# EAGLE board Printrhub (EAGLE 7.5.0)
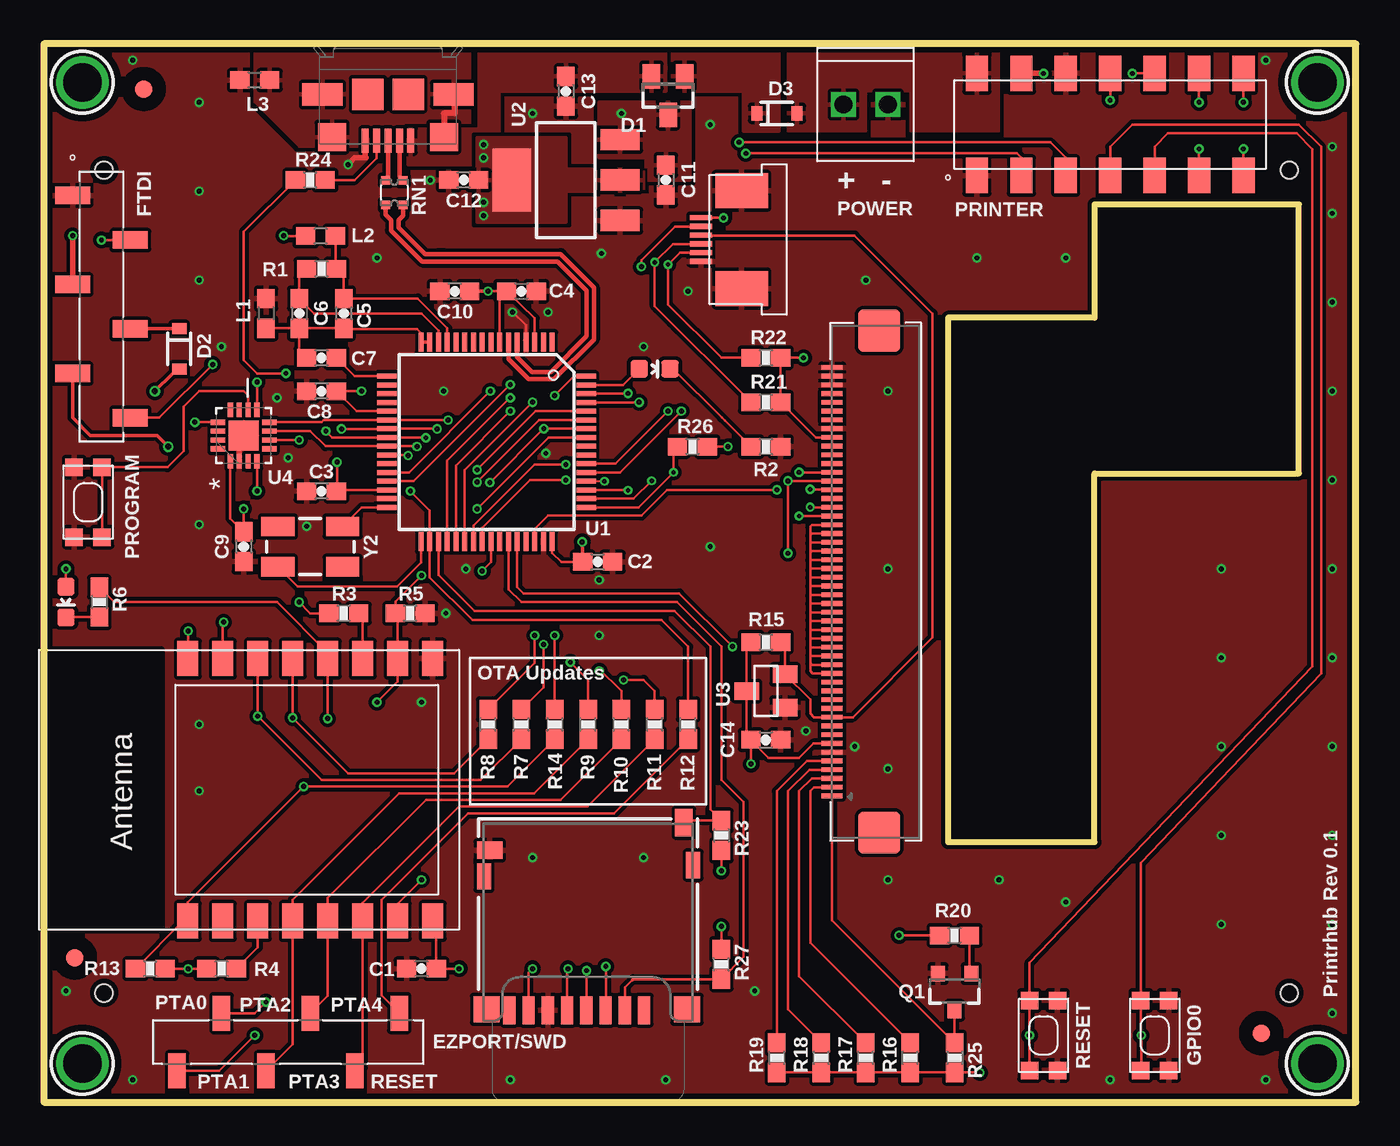
[diagram p0: board, top side]
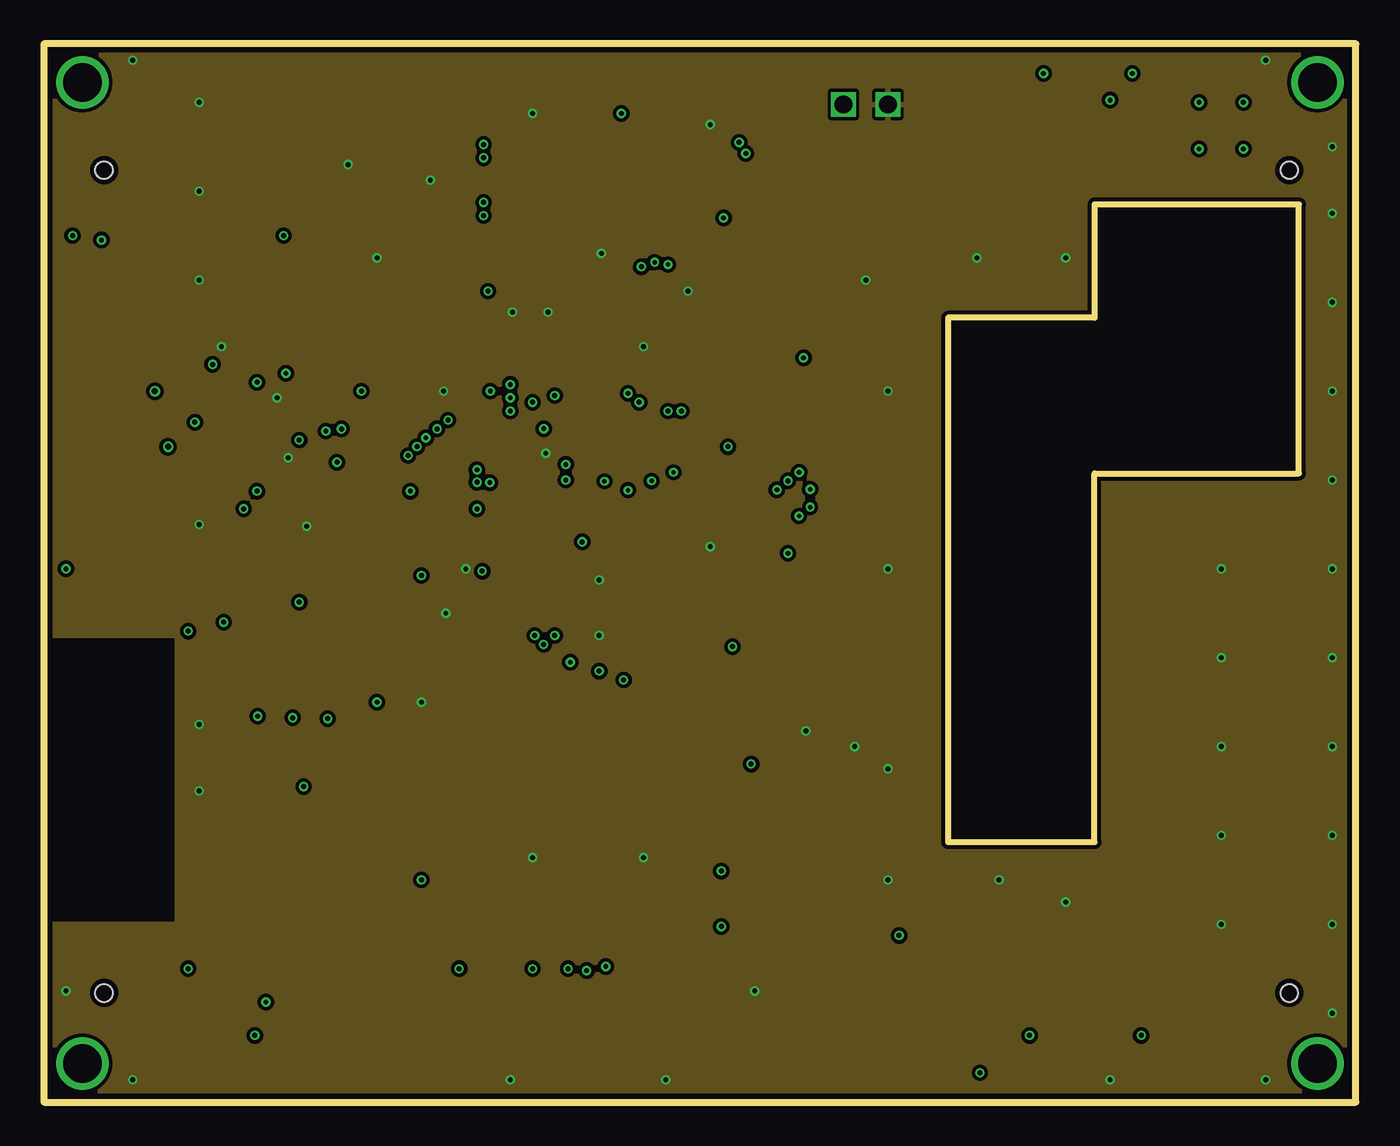
[diagram p1: board, inner layer GND]
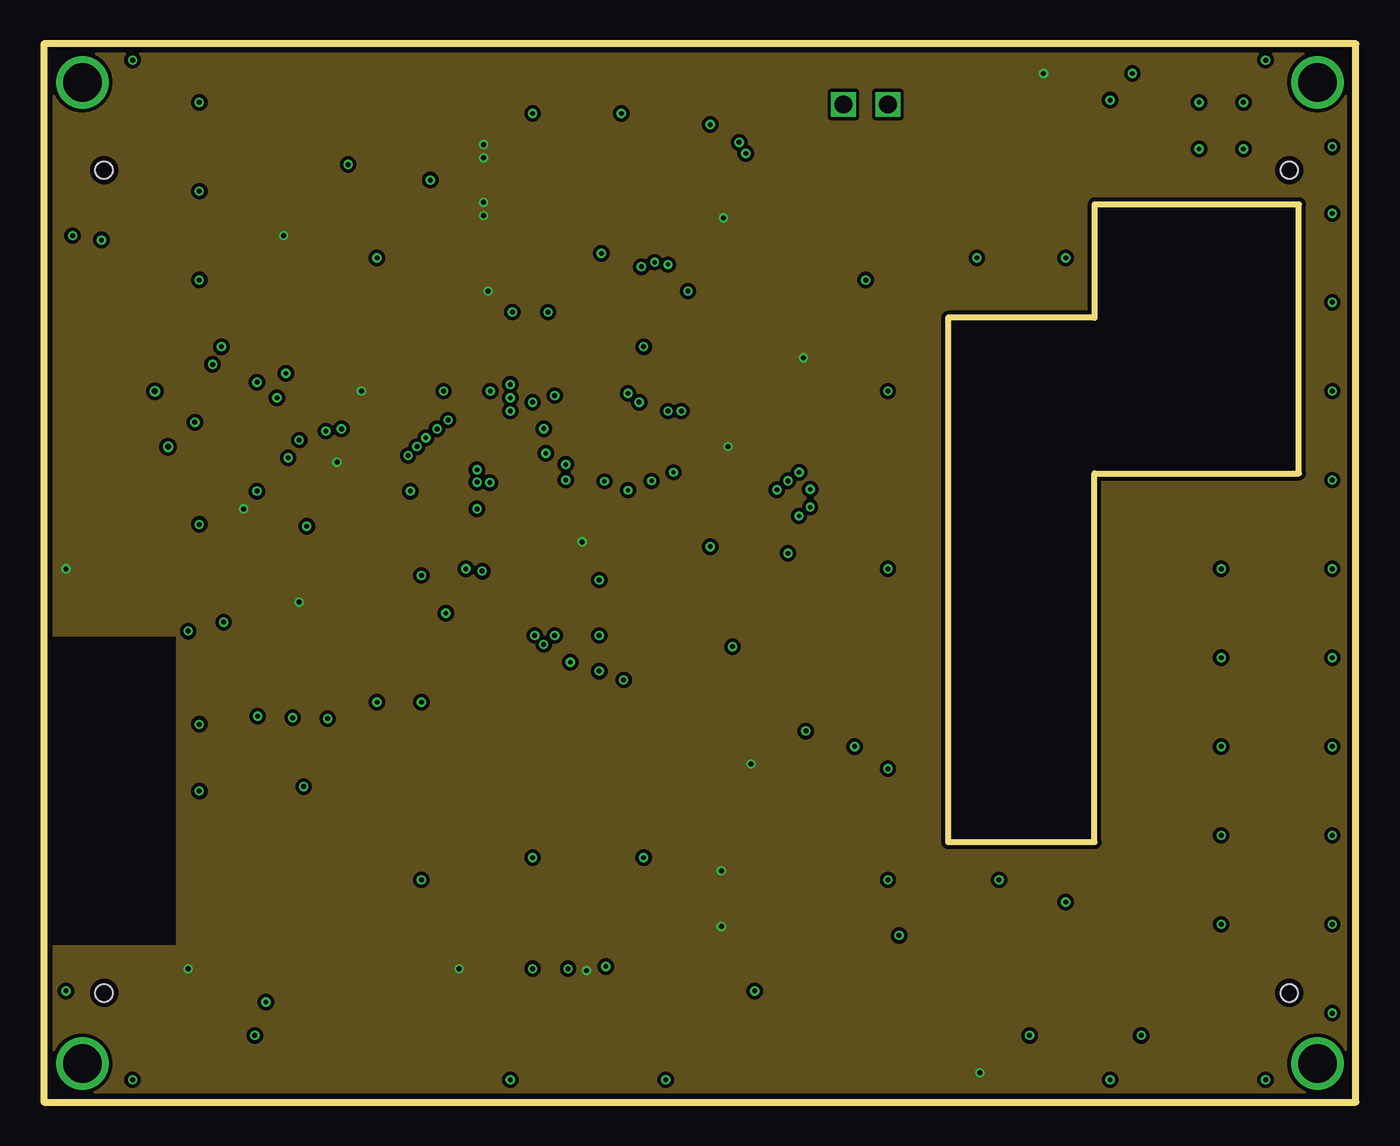
[diagram p2: board, inner layer 3V3]
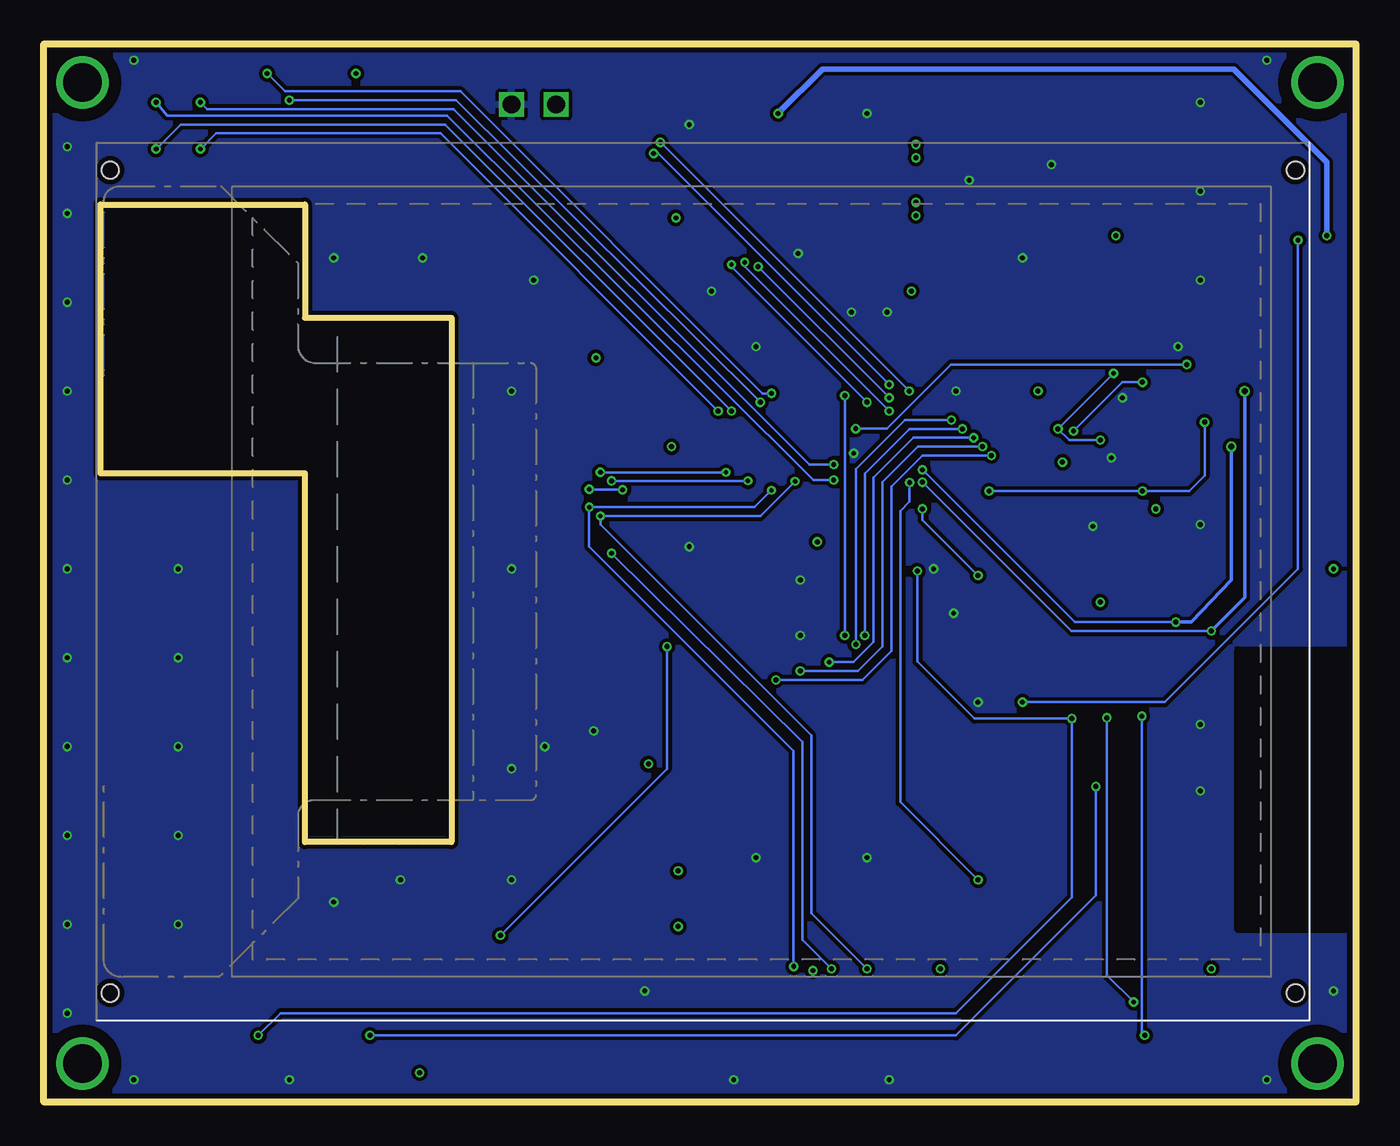
[diagram p3: board, bottom side, seen from below]

Size 75 x 60.5 mm. Coordinates in mm from the lower left corner, seen from the top.
Outline: 0,0 75,0 75,60.5 0,60.5 0,0
Outline: 51.69,14.86 60.07,14.86 60.07,35.94 71.75,35.94 71.75,51.31 60.07,51.31 60.07,44.83 51.69,44.83 51.69,14.86
Copper layers (1+2*15+16): Top 0.035mm / dielectric 0.38mm / GND 0.035mm / dielectric 0.71mm / 3V3 0.035mm / dielectric 0.38mm / Bottom 0.035mm
Design rules "PCB-POOL HighSpec_ML4 *": minimum track width 0.125mm, minimum drill 0.2mm, track to track 0.125mm, track to pad 0.125mm, pad to pad 0.125mm, via to via 0.125mm, smd to smd 0.125mm, copper to edge 0.3mm, drill to drill 0.2mm, minimum pad ring 0.2mm, minimum via ring 0.125mm, stop-mask expansion 0.075mm, vias tented up to drill 11mil, thermal gap 0.2mm
Net classes: 1 USB: width 0.267 mm, drill 0.33 mm, clearance 0.159 mm; 2 Top GND Pour: clearance 0.762 mm to class 1
Milling: area 51.7,14.9 to 71.8,51.3

## Footprints (pad centres in the part's own frame; a part is rotated, then mirrored left to right if it is on the bottom)
0603-CAP = smd 1.1 x 1: 1 -0.85,0; 2 0.85,0
SOT23 = smd 1 x 1.4: 1 -0.95,-1.1; 2 0.95,-1.1; 3 0,1.1
SOD-323 = smd 0.63 x 0.83: A 1.15,0; C -1.15,0
1X06_SMD_STRAIGHT = smd 1 x 2: 1 0,1.65; 2 -2.54,-1.65; 3 -5.08,1.65; 4 -7.62,-1.65; 5 -10.16,1.65; 6 -12.7,-1.65
DM3D-SF = smd 0.7 x 1.6: 1 3.2,0.8; 2 2.1,0.8; 3 1,0.8; 4 -0.1,0.8; 5 -1.2,0.8; 6 -2.3,0.8; 7 -3.4,0.8; 8 -4.5,0.8 | smd 1.5 x 1.5: 9 -5.8,0.85; 14 5.65,0.85 | smd 0.8 x 1.5: 10 -5.95,8.45; 13 6,9.1 | smd 1.45 x 1: 11 -5.625,9.95 | smd 1 x 1.55: 12 5.475,11.525
1981584-1 = smd 0.4 x 1.35: 1 -1.3,4.1; 2 -0.65,4.1; 3 0,4.1; 4 0.65,4.1; 5 1.3,4.1 | smd 1.8 x 1.8: M1 -1.15,1.45; M2 1.15,1.45 | smd 2.3 x 1.3: S1 -3.75,1.45; S2 3.75,1.45 | smd 1.6 x 1.6: S3 -3.2,3.885; S4 3.2,3.885
1X02_2.54_SCREWTERM = drill 1.016 square: P1 2.54,0; P2 0,0
0603 = smd 1.1 x 1: 1 -0.85,0; 2 0.85,0
LED-0603 = smd 1 x 1: A 0,-0.877; C 0,0.877
2X07_SMT = smd 1.27 x 2.032: 1 -7.62,-2.921; 2 -7.62,2.921; 3 -5.08,-2.921; 4 -5.08,2.921; 5 -2.54,-2.921; 6 -2.54,2.921; 7 0,-2.921; 8 0,2.921; 9 2.54,-2.921; 10 2.54,2.921; 11 5.08,-2.921; 12 5.08,2.921; 13 7.62,-2.921; 14 7.62,2.921
SOT23-3 = smd 0.8 x 0.9: 1 -0.95,-1; 2 0.95,-1; 3 0,1.1
0603-RES = smd 1.1 x 1: 1 -0.85,0; 2 0.85,0
EXB34V = smd 0.5 x 0.5: 1 -0.5,-0.7; 2 0.5,-0.7; 3 0.5,0.7; 4 -0.5,0.7
KMR2 = smd 1 x 1: 1 2,0.8; 2 2,-0.8; 3 -2,0.8; 4 -2,-0.8
TFT_2.83IN_240X320_50PIN = smd 0.275 x 1.2 bottom: 1 12.25,-10.39; 2 11.75,-10.39; 3 11.25,-10.39; 4 10.75,-10.39; 5 10.25,-10.39; 6 9.75,-10.39; 7 9.25,-10.39; 8 8.75,-10.39; 9 8.25,-10.39; 10 7.75,-10.39; 11 7.25,-10.39; 12 6.75,-10.39; 13 6.25,-10.39; 14 5.75,-10.39; 15 5.25,-10.39; 16 4.75,-10.39; 17 4.25,-10.39; 18 3.75,-10.39; 19 3.25,-10.39; 20 2.75,-10.39; 21 2.25,-10.39; 22 1.75,-10.39; 23 1.25,-10.39; 24 0.75,-10.39; 25 0.25,-10.39; 26 -0.25,-10.39; 27 -0.75,-10.39; 28 -1.25,-10.39; 29 -1.75,-10.39; 30 -2.25,-10.39; 31 -2.75,-10.39; 32 -3.25,-10.39; 33 -3.75,-10.39; 34 -4.25,-10.39; 35 -4.75,-10.39; 36 -5.25,-10.39; 37 -5.75,-10.39; 38 -6.25,-10.39; 39 -6.75,-10.39; 40 -7.25,-10.39; 41 -7.75,-10.39; 42 -8.25,-10.39; 43 -8.75,-10.39; 44 -9.25,-10.39; 45 -9.75,-10.39; 46 -10.25,-10.39; 47 -10.75,-10.39; 48 -11.25,-10.39; 49 -11.75,-10.39; 50 -12.25,-10.39 | smd 2.4 x 2.4 bottom: PAD1 14.35,-13.09; PAD2 -14.35,-13.09 | hole 1: 23.52,-36.525; 23.52,31.225; -23.52,31.225; -23.52,-36.525
MK20DX256VLH7 = smd 1.1 x 0.285: 1 -5.7,3.75; 2 -5.7,3.25; 3 -5.7,2.75; 4 -5.7,2.25; 5 -5.7,1.75; 6 -5.7,1.25; 7 -5.7,0.75; 8 -5.7,0.25; 9 -5.7,-0.25; 10 -5.7,-0.75; 11 -5.7,-1.25; 12 -5.7,-1.75; 13 -5.7,-2.25; 14 -5.7,-2.75; 15 -5.7,-3.25; 16 -5.7,-3.75; 33 5.7,-3.75; 34 5.7,-3.25; 35 5.7,-2.75; 36 5.7,-2.25; 37 5.7,-1.75; 38 5.7,-1.25; 39 5.7,-0.75; 40 5.7,-0.25; 41 5.7,0.25; 42 5.7,0.75; 43 5.7,1.25; 44 5.7,1.75; 45 5.7,2.25; 46 5.7,2.75; 47 5.7,3.25; 48 5.7,3.75 | smd 0.285 x 1.1: 17 -3.75,-5.7; 18 -3.25,-5.7; 19 -2.75,-5.7; 20 -2.25,-5.7; 21 -1.75,-5.7; 22 -1.25,-5.7; 23 -0.75,-5.7; 24 -0.25,-5.7; 25 0.25,-5.7; 26 0.75,-5.7; 27 1.25,-5.7; 28 1.75,-5.7; 29 2.25,-5.7; 30 2.75,-5.7; 31 3.25,-5.7; 32 3.75,-5.7; 49 3.75,5.7; 50 3.25,5.7; 51 2.75,5.7; 52 2.25,5.7; 53 1.75,5.7; 54 1.25,5.7; 55 0.75,5.7; 56 0.25,5.7; 57 -0.25,5.7; 58 -0.75,5.7; 59 -1.25,5.7; 60 -1.75,5.7; 61 -2.25,5.7; 62 -2.75,5.7; 63 -3.25,5.7; 64 -3.75,5.7
SOT223 = smd 1.219 x 2.235: 1 -2.311,-3.099; 2 0,-3.099; 3 2.311,-3.099 | smd 3.6 x 2.2: 4 0,3.099
QFN50P300X300X100-17N = smd 0.813 x 0.305: 1 -1.473,0.762; 2 -1.473,0.254; 3 -1.473,-0.254; 4 -1.473,-0.762; 9 1.473,-0.762; 10 1.473,-0.254; 11 1.473,0.254; 12 1.473,0.762 | smd 0.305 x 0.813: 5 -0.762,-1.473; 6 -0.254,-1.473; 7 0.254,-1.473; 8 0.762,-1.473; 13 0.762,1.473; 14 0.254,1.473; 15 -0.254,1.473; 16 -0.762,1.473 | smd 1.702 x 1.702: 17 0,0
MOUNTINGHOLE_2.0_PLATED = drill 2.2 pad 3: P$1 0,0
ER-CON06HB-1 = smd 0.3 x 1.25: P1 -1.25,0; P2 -0.75,0; P3 -0.25,0; P4 0.25,0; P5 0.75,0; P6 1.25,0 | smd 2 x 3: PAD@0 -2.79,-2.325; PAD@1 2.79,-2.325
FIDUCIAL_1MM = smd 1 x 1: 1 0,0
ESP-12 = smd 2 x 1.2: 1 -7.5,4.5; 2 -7.5,2.5; 3 -7.5,0.5; 4 -7.5,-1.5; 5 -7.5,-3.5; 6 -7.5,-5.5; 7 -7.5,-7.5; 8 -7.5,-9.5; 9 7.5,-9.5; 10 7.5,-7.5; 11 7.5,-5.5; 12 7.5,-3.5; 13 7.5,-1.5; 14 7.5,0.5; 15 7.5,2.5; 16 7.5,4.5
CRYSTAL-SMD-5X3 = smd 1.9 x 1.1: 1 -1.85,-1.15; 2 1.85,-1.15; 3 1.85,1.15; 4 -1.85,1.15

## Placement (x,y rotation side)
C1  10uF  [0603-CAP]  21.59,7.62 180 top
C2  0.1uF  [0603-CAP]  31.67,30.88 0 top
C3  0.1uF  [0603-CAP]  15.88,34.92 180 top
C4  0.1uF  [0603-CAP]  27.3,46.35 0 top
C5  2.2uF  [0603-CAP]  17.14,45.09 270 top
C6  0.1uF  [0603-CAP]  14.61,45.09 270 top
C7  0.1uF  [0603-CAP]  15.88,42.55 180 top
C8  0.1uF  [0603-CAP]  15.88,40.64 180 top
C9  0.1uF  [0603-CAP]  11.43,31.75 270 top
C10  2.2uF  [0603-CAP]  23.5,46.35 180 top
C11  10uF  [0603-CAP]  35.56,52.7 270 top
C12  22uF  [0603-CAP]  24,52.7 180 top
C13  2.2uF  [0603-CAP]  29.84,57.78 270 top
C14  0.1uF  [0603-CAP]  41.27,20.7 0 top
D1  [SOT23]  35.69,57.53 180 top
D2  1N4148WX-TP  [SOD-323]  7.75,43.05 270 top
D3  1N4148WX-TP  [SOD-323]  41.91,56.52 0 top
EZPORT/SWD  [1X06_SMD_STRAIGHT]  20.32,3.43 0 top
FTDI  [1X06_SMD_STRAIGHT]  3.3,39.12 270 top
J1  DM3D-SF  [DM3D-SF]  31.11,4.45 0 top
J2  1981584-1  [1981584-1]  19.68,59.05 180 top
JP3  M022.54MM_SCREWTERM  [1X02_2.54_SCREWTERM]  45.72,57.02 0 top
L1  600 Ohm / 500 mA  [0603]  12.7,45.09 270 top
L2  600 Ohm / 500 mA  [0603]  15.83,49.51 180 top
L3  600 Ohm / 500 mA  [0603]  12.06,58.42 0 top
LED  AMBER/ 592 nm  [LED-0603]  34.92,41.91 270 top
LED1  [LED-0603]  1.27,28.57 180 top
PRINTER  [2X07_SMT]  60.96,55.88 0 top
Q1  [SOT23-3]  52.07,6.35 180 top
R1  470  [0603-RES]  15.88,47.62 180 top
R2  300  [0603-RES]  41.27,37.47 180 top
R3  10K  [0603-RES]  17.14,27.94 180 top
R4  10K  [0603-RES]  10.16,7.62 180 top
R5  10K  [0603-RES]  20.95,27.94 180 top
R6  1K  [0603-RES]  3.17,28.57 270 top
R7  0  [0603-RES]  27.3,21.59 90 top
R8  0  [0603-RES]  25.4,21.59 90 top
R9  0  [0603-RES]  31.11,21.59 90 top
R10  0  [0603-RES]  33.02,21.59 90 top
R11  0  [0603-RES]  34.92,21.59 90 top
R12  0  [0603-RES]  36.83,21.59 90 top
R13  10K  [0603-RES]  6.1,7.62 0 top
R14  0  [0603-RES]  29.21,21.59 270 top
R15  10K  [0603-RES]  41.27,26.29 180 top
R16  10  [0603-RES]  49.53,2.54 90 top
R17  10  [0603-RES]  46.99,2.54 90 top
R18  10  [0603-RES]  44.45,2.54 90 top
R19  10  [0603-RES]  41.91,2.54 90 top
R20  1K  [0603-RES]  52.07,9.53 0 top
R21  10K  [0603-RES]  41.27,40.01 0 top
R22  10K  [0603-RES]  41.27,42.55 0 top
R23  10K  [0603-RES]  38.73,15.24 270 top
R24  0  [0603-RES]  15.24,52.7 0 top
R25  1K  [0603-RES]  52.07,2.54 270 top
R26  10K  [0603-RES]  37.08,37.47 0 top
R27  10K  [0603-RES]  38.73,7.87 90 top
RN1  33  [EXB34V]  20.05,51.99 180 top
SW1  SPST_TACT-KMR2  [KMR2]  57.15,3.81 270 top
SW2  SPST_TACT-KMR2  [KMR2]  63.5,3.81 270 top
SW3  SPST_TACT-KMR2  [KMR2]  2.54,34.29 90 top
TFT1  DISP_LCD_2.8IN_240X320_50PIN  [TFT_2.83IN_240X320_50PIN]  34.67,29.75 270 bottom
U1  MK20DX256VLH7  [MK20DX256VLH7]  25.32,37.74 270 top
U2  AP1117E  [SOT223]  29.84,52.7 90 top
U3  MAX308-SOT23  [SOT23]  41.27,23.5 90 top
U4  TEENSY_BOOTLOADER-MKL02  [QFN50P300X300X100-17N]  11.43,38.1 90 top
U$15  MOUNTINGHOLE2.0  [MOUNTINGHOLE_2.0_PLATED]  2.2,58.3 0 top
U$16  MOUNTINGHOLE2.0  [MOUNTINGHOLE_2.0_PLATED]  72.8,58.3 0 top
U$17  MOUNTINGHOLE2.0  [MOUNTINGHOLE_2.0_PLATED]  2.2,2.2 0 top
U$18  MOUNTINGHOLE2.0  [MOUNTINGHOLE_2.0_PLATED]  72.8,2.2 0 top
U$20  ER-TPC028-4.1  [ER-CON06HB-1]  37.56,49.3 90 top
U$38  FIDUCIAL  [FIDUCIAL_1MM]  1.78,8.26 0 top
U$39  FIDUCIAL  [FIDUCIAL_1MM]  5.71,57.91 0 top
U$40  FIDUCIAL  [FIDUCIAL_1MM]  69.6,3.94 0 top
X1  [ESP-12]  12.73,17.85 90 top
Y2  16Mhz/8pF  [CRYSTAL-SMD-5X3]  15.24,31.75 0 top

## Library data of the parts
C1 C11 = appfruits; MF: Murata; MPN: GRM188R60J106ME47D
C2-C4 C6-C9 C14 = appfruits; MF: Kemet; MPN: C0603C104J3RACTU
C5 C10 C13 = appfruits; MF: Kemet; MPN: C0603C225K4PACTU
C12 = appfruits; MF: Murata; MPN: GRM188R60J226MEA0D
D1 = diode
D2 D3 = SparkFun-DiscreteSemi; MF: Micro Commercial Co; MPN: 1N4148WX-TP; PROD_ID: DIO-09646
EZPORT/SWD FTDI JP3 = SparkFun-Connectors
J1 = con-sd-card
J2 = con-usb
L1-L3 = appfruits; MF: Murata; MPN: BLM18AG601SN1D
LED = appfruits; MF: Avago Technologies; MPN: HSMA-C190
LED1 = appfruits; MF: Avago; MPN: HSMG-C190
PRINTER = pinhead+
Q1 = appfruits; MF: ON Semiconductor; MPN: MMBT2222ALT1G
R1 = appfruits; MF: Panasonic; MPN: ERJ-3GEYJ471V
R2 TFT1 U3 U4 U$20 = appfruits
R3-R5 R13 R15 R21-R23 R26 R27 = appfruits; MF: Panasonic; MPN: ERJ-3GEYJ103V
R6 R20 R25 = appfruits; MF: Panasonic; MPN: ERJ-3GEYJ102V
R7-R12 R14 R24 = appfruits; MF: Panasonic; MPN: ERJ-3GEY0R00V
R16-R19 = appfruits; MF: Panasonic; MPN: ERJ-3EKF10R0V
RN1 = resistor-dil; MF: Panasonic; MPN: EXB-34V330JV; OC_FARNELL: unknown; OC_NEWARK: unknown
SW1-SW3 U$38-U$40 X1 = adafruit
U1 = appfruits; MF: Freescale; MPN: MK20DX256VLH7
U2 = v-reg
U$15-U$18 = microbuilder
Y2 = appfruits; MF: ECS; MPN: ECS-160-8-30B-CKM

## Nets
3.3V: C1.1 C2.1 C3.1 C4.1 C8.1 C9.1 C10.1 C12.1 C14.1 J1.4 L2.2 LED1.A PRINTER.4 R3.2 R4.2 R13.2 R15.2 R16.1 R17.1 R18.1 R19.1 R21.2 R22.2 R23.2 R25.2 R26.2 R27.2 TFT1.7 TFT1.8 TFT1.9 TFT1.40 TFT1.41 TFT1.42 U1.3 U1.7 U1.21 U1.30 U1.48 U2.2 U2.4 U3.3 U4.1 U$20.P6 X1.8
12V: D1.1 D3.C
ESP_GPIO0: PRINTER.7 R6.1 SW2.2 SW2.4 U1.41 X1.12
ESP_GPIO4: EZPORT/SWD.6 R7.1 X1.14
ESP_GPIO5: EZPORT/SWD.5 R8.1 X1.13
ESP_GPIO12: EZPORT/SWD.2 R11.1 X1.6
ESP_GPIO13: EZPORT/SWD.1 R12.1
ESP_GPIO14: EZPORT/SWD.3 R10.1 X1.5
ESP_GPIO16: EZPORT/SWD.4 R9.1 X1.4
ESP_RESET: PRINTER.9 R13.1 R14.2 SW1.2 SW1.4 X1.1
GND [Top GND Pour]: C1.2 C2.2 C3.2 C4.2 C8.2 C9.2 C10.2 C11.2 C12.2 C13.2 C14.2 FTDI.6 J1.6 J1.11 J2.5 JP3.P1 L1.1 L3.1 PRINTER.1 PRINTER.6 Q1.2 R2.1 R5.1 SW1.1 SW1.3 SW2.1 SW2.3 SW3.1 SW3.3 TFT1.6 TFT1.43 TFT1.48 TFT1.49 TFT1.50 U1.4 U1.31 U1.47 U2.1 U3.1 U4.2 U4.17 U$20.P1 U$20.PAD@0 U$20.PAD@1 X1.9
ID: J2.4 R24.2
LCD_CS: R26.1 TFT1.38 U1.49
LCD_DC: TFT1.36 U1.46
LCD_LITE: R20.1 U1.44
LCD_RESET: R15.1 TFT1.10 U3.2 U$20.P4
MK20_GPIO_3: PRINTER.5 U1.28
MK20_GPIO_4: PRINTER.3 U1.29
MK20_PTA0: R7.2 U1.22 U4.8
MK20_PTA1: R8.2 R24.1 U1.23 U4.6
MK20_PTA2: R9.2 U1.24 U4.9
MK20_PTA3: R10.2 U1.25 U4.7
MK20_PTA4: R11.2 U1.26
N$1: R14.1 U1.64
N$4: R3.1 X1.11
N$5: R4.1 X1.3
N$7: LED1.C R6.2
N$10: Q1.3 R25.1 TFT1.1
N$11: R16.2 TFT1.2
N$12: LED.A U1.63
N$13: R17.2 TFT1.3
N$14: R18.2 TFT1.4
N$15: R19.2 TFT1.5
N$16: Q1.1 R20.2
N$17: TFT1.15 TFT1.16 TFT1.17 TFT1.18 TFT1.19 TFT1.20 TFT1.21 TFT1.22 TFT1.23 TFT1.24 TFT1.25 TFT1.26 TFT1.27 TFT1.28 TFT1.29 TFT1.30 TFT1.31 TFT1.32
N$18: LED.C R2.2
N$27: U1.32 Y2.3
N$28: U1.33 Y2.1
PRINTER_CTS: PRINTER.8 U1.61
PRINTER_ERASE: PRINTER.11 U1.53
PRINTER_RESET: PRINTER.13 U1.54
PRINTER_RTS: PRINTER.10 U1.62
PRINTER_RX: PRINTER.14 U1.40
PRINTER_TX: PRINTER.12 U1.39
PROGRAM: SW3.2 SW3.4 U4.10
RESET_B: R12.2 U1.34 U4.4 U4.13
SCL: R21.1 U1.37 U$20.P3
SCREW_VIN: D3.A JP3.P2 PRINTER.2
SD_CARD_DETECT: J1.12 R23.1 U1.35
SD_CS: J1.2 R27.1 U1.43
SDA: R22.1 U1.38 U$20.P2
SPI_CLK: J1.5 TFT1.37 U1.50
SPI_MISO: J1.7 TFT1.33 U1.52
SPI_MOSI: J1.3 TFT1.34 U1.51
TOUCH_INT: U1.36 U$20.P5
UART2_CTS: FTDI.1 U1.58 X1.7
UART2_RTS: FTDI.5 R5.2 U1.57 X1.10
UART2_RX: D2.A U1.59 X1.16
UART2_RX_5V: D2.C FTDI.3
UART2_TX: FTDI.2 U1.60 X1.15
USB_5V: C13.1 D1.2 J2.1
USB_CON_N [USB]: J2.2 RN1.1
USB_CON_P [USB]: J2.3 RN1.2
USB_D_N [USB]: RN1.4 U1.6
USB_D_P [USB]: RN1.3 U1.5
USB_SHIELD: J2.S1 J2.S2 J2.S3 J2.S4 L3.2
VCC: C11.1 D1.3 FTDI.4 U2.3
VDDA: C5.1 L2.1 R1.1 U1.13
VREF_OUT: C7.1 U1.17
VREFH: C6.1 R1.2 U1.14
VREFL: C5.2 C6.2 C7.2 L1.2 U1.15 U1.16

## Tracks (layer width: path | path; a pad name or v marks a point on that pad's centre or on a via)
3.3V  (via drill 0.28)
  Top 0.152: v25.4,46.35 C4.1 | U1.48 29.07,31.38 29.59,30.86 30.8,30.86 C2.1 | U1.7 26.07,45.94 C4.1 | U1.3 28.07,44.81 C4.1 | U1.21 17.88,39.49 C8.1 v18.16,40.64 | U1.30 16.79,34.99 C3.1 16.76,34.96 v16.76,36.58 | C14.1 40.17,20.32 U3.3 40.17,26.04 R15.2 | TFT1.9 TFT1.8 TFT1.7 43.99,20.5 43.18,19.68 41.44,19.68 C14.1 | LED1.A v1.27,30.48 | U4.1 10.67,33.36 C9.1 v11.43,33.91 | R3.2 15.24,27.94 v14.61,28.57 | U$20.P6 37.6,50.55 v38.86,50.55 | TFT1.40 TFT1.41 TFT1.42 44.13,38 R21.2 R22.2 v43.43,42.55 | L2.2 13.74,49.51 v13.72,49.53 | v40.43,19.32 40.43,20.69 C14.1 | R23.2 v38.73,13.21 38.73,13.15 | v53.51,1.67 53.5,1.69 R25.2 R16.1 R17.1 R18.1 R19.1 | v23.75,7.62 C1.1 22.44,10.14 X1.8 | R13.2 v8.26,7.62 R4.2 | J1.4 31.02,7.49 v31.04,7.51 | R27.2 v38.73,10.03 | R26.2 v39.12,37.47
  Top 0.203: C2.1 v30.78,32.02 | C10.1 v25.4,46.35
  Top 0.305: PRINTER.4 v57.15,58.8
  other vias: 25.15,50.67 25.15,53.98 25.15,54.74 25.15,51.44
  pour Top (isolate 0.203): 24.77,55.12 29.84,55.12 29.84,53.34 34.29,53.34 34.29,52.07 29.84,52.07 29.84,50.29 24.77,50.29
  pour 3V3 (isolate 0.203): 0,0 75,0 75,60.5 0,60.5 0,26.67 7.62,26.67 7.62,8.89 0,8.89
12V
  pour Top (isolate 0.203): 35.94,60.07 42.04,60.07 42.04,55.5 40.01,55.5 40.01,57.78 35.94,57.78
ESP_GPIO0  (via drill 0.28)
  Top 0.152: R6.1 4.03,28.57 13.34,28.57 16.23,25.68 X1.12 16.23,23.19 v16.23,21.92 | SW2.2 62.74,1.85 v62.74,3.81 62.7,3.85 SW2.4 62.7,13.68 73.03,24.51 73.03,54.61 71.75,55.88 62.23,55.88 60.96,54.61 PRINTER.7 | U1.41 25.57,30.86 v25.06,30.35
  Bottom 0.152: v62.74,3.81 61.47,5.08 22.86,5.08 16.23,11.71 v16.23,21.92 21.79,21.92 25.06,25.2 v25.06,30.35
ESP_GPIO4  (via drill 0.28)
  Top 0.152: X1.14 v12.23,22.06 15.88,18.41 24.98,18.41 R7.1 | EZPORT/SWD.6 10.03,1.78 v12.06,3.81
  Bottom 0.152: v12.23,22.06 12.23,3.98 v12.06,3.81
ESP_GPIO5  (via drill 0.28)
  Top 0.152: X1.13 v14.23,21.96 17.4,18.8 23.46,18.8 R8.1 | EZPORT/SWD.5 12.06,5.08 v12.7,5.71
  Bottom 0.152: v12.7,5.71 14.23,7.25 v14.23,21.96
ESP_GPIO12
  Top 0.152: R11.1 31.08,16.89 23.75,16.89 18.23,11.37 X1.6 18.23,1.98 EZPORT/SWD.2
ESP_GPIO13
  Top 0.152: R12.1 32.6,16.51 24.26,16.51 19.3,11.56 19.3,6.09 EZPORT/SWD.1
ESP_GPIO14
  Top 0.152: R10.1 29.55,17.27 21.84,17.27 16.23,11.66 X1.5 16.23,6.07 EZPORT/SWD.3
ESP_GPIO16
  Top 0.152: R9.1 28.03,17.65 20.32,17.65 14.23,11.56 X1.4 14.23,3.31 EZPORT/SWD.4
ESP_RESET  (via drill 0.28)
  Top 0.152: R14.2 26.5,18.03 v14.86,18.03 8.23,11.4 X1.1 7.98,10.35 R13.1 | SW1.2 v56.35,3.81 SW1.4 56.35,7.96 72.52,24.89 72.52,54.48 71.63,55.37 64.26,55.37 63.5,54.61 PRINTER.9
  Bottom 0.152: v14.86,18.03 14.86,11.81 22.86,3.81 v56.35,3.81
GND  (via drill 0.28)
  Top 0.152: U1.4 27.57,44.41 v26.79,45.16
  Top 0.305: U4.2 11.18,37.85 U4.17 | J2.5 18.39,54.01 18.41,53.98 17.78,53.98 v17.4,53.59
  other vias: 24.13,30.48 15.03,32.91 8.89,46.99 22.99,27.94 13.97,36.83 13.34,40.26 36.83,46.35 46.35,20.32 43.56,21.21 31.88,48.51 27.94,56.52 22.1,52.7 28.83,45.16 8.89,52.07 10.16,43.18 8.89,33.02 8.89,57.15 8.89,21.59 8.89,17.78 21.59,22.86 1.27,6.35 5.08,1.27 26.67,1.27 35.56,1.27 60.96,1.27 69.85,1.27 73.66,5.08 73.66,10.16 73.66,15.24 73.66,20.32 73.66,25.4 73.66,30.48 73.66,35.56 73.66,40.64 73.66,45.72 73.66,50.8 73.66,54.61 69.85,59.56 5.08,59.56 58.42,48.26 53.34,48.26 46.99,46.99 48.26,40.64 48.26,30.48 48.26,19.05 38.1,31.75 34.29,43.18 22.86,40.64 28.7,37.08 58.42,11.43 48.26,12.7 54.61,12.7 67.31,30.48 67.31,25.4 67.31,20.32 67.31,15.24 67.31,10.16 38.1,55.88 31.75,26.67 31.75,29.84 34.29,13.97 27.94,13.97 40.64,6.35 19.05,48.26
  pour Top (isolate 0.203, rank 4): 0,0 75,0 75,60.5 0,60.5
  pour GND (isolate 0.203): 0,0 75,0 75,60.5 0,60.5 0,26.67 7.62,26.67 7.62,10.16 0,10.16
  pour Bottom (isolate 0.203): 0,0 75,0 75,60.5 0,60.5
ID
  Top 0.152: J2.4 19.04,53.96 17.78,52.7 R24.2
LCD_CS  (via drill 0.25, 0.28)
  Top 0.152: U1.49 33.99,33.99 v36,36 36,37.23 R26.1 | TFT1.38 v43.18,36
  Bottom 0.152: v43.18,36 v36,36
LCD_DC  (via drill 0.28)
  Top 0.152: U1.46 28.07,32.77 28.83,33.53 34.16,33.53 35.63,35 v41.91,35 | v43.81,35.03 45.03,35.03 TFT1.36
  Bottom 0.152: v41.91,35 43.81,35 v43.81,35.03
LCD_LITE  (via drill 0.28)
  Top 0.152: U1.44 27.07,29.45 27.43,29.08 36.32,29.08 v39.37,26.04 | v48.9,9.53 R20.1
  Bottom 0.152: v39.37,26.04 39.37,19.05 v48.9,9.53
LCD_RESET
  Top 0.152: U$20.P4 37.58,49.53 46.35,49.53 50.8,45.09 50.8,26.54 46.26,22 TFT1.10 44.04,22 43.81,22.23 43.81,23 U3.2 42.38,26.04 R15.1
MK20_GPIO_3  (via drill 0.28)
  Top 0.152: U1.28 20.88,35.99 v25.53,40.64 | v39.75,54.86 57.53,54.86 58.42,53.98 PRINTER.5
  Bottom 0.152: v25.53,40.64 v39.75,54.86
MK20_GPIO_4  (via drill 0.28)
  Top 0.152: U1.29 21.14,35.49 v26.67,41.02 | v40.13,54.23 55.63,54.23 55.88,53.98 PRINTER.3
  Bottom 0.152: v26.67,41.02 39.88,54.23 v40.13,54.23
MK20_PTA0  (via drill 0.28)
  Top 0.152: v23.11,38.99 23.24,38.99 U1.22 16,38.99 15.88,38.86 U4.8 | v28.57,26.16 28.57,23.71 R7.2
  Bottom 0.152: v28.57,26.16 28.57,36.2 25.78,38.99 v23.11,38.99
MK20_PTA1  (via drill 0.28)
  Top 0.152: v22.48,38.48 22.6,38.49 U1.23 v17.02,38.48 | U4.6 v14.61,37.85 | v13.84,41.66 12.19,41.66 11.43,42.42 11.43,49.74 R24.1 | v28.07,26.67 28.07,25.11 R8.2
  Bottom 0.152: v28.07,26.67 28.07,35.94 25.53,38.48 v22.48,38.48 | v14.61,37.85 16.38,37.85 v17.02,38.48 v13.84,41.66
MK20_PTA2  (via drill 0.28)
  Top 0.152: R9.2 31.11,24.13 v30.1,25.15 | v21.84,37.97 21.95,37.99 U1.24 16.49,37.99 v16.13,38.35 | v12.19,41.15 U4.9
  Bottom 0.152: v21.84,37.97 25.27,37.97 27.56,35.69 27.56,26.29 28.7,25.15 v30.1,25.15 | v16.13,38.35 13.34,41.15 v12.19,41.15
MK20_PTA3  (via drill 0.28)
  Top 0.152: R10.2 33.02,23.5 31.75,24.77 v31.75,24.64 | v21.34,37.47 21.44,37.49 U1.25 16.1,37.49 15.24,38.35 U4.7
  Bottom 0.152: v21.34,37.47 25.02,37.47 27.05,35.43 27.05,26.04 28.45,24.64 v31.75,24.64
MK20_PTA4  (via drill 0.28)
  Top 0.152: R11.2 34.92,23.5 34.29,24.13 v33.15,24.13 | U1.26 20.8,36.99 v20.83,36.96
  Bottom 0.152: v33.15,24.13 28.19,24.13 26.54,25.78 26.54,35.18 24.77,36.96 v20.83,36.96
N$1  (via drill 0.28)
  Top 0.152: R14.1 v29.21,26.67 | U1.64 30.31,41.49 v29.21,40.39
  Bottom 0.152: v29.21,26.67 v29.21,40.39
N$4
  Top 0.152: X1.11 18.23,27.7 R3.1
N$5
  Top 0.152: R4.1 12.23,8.84 X1.3
N$7
  Top 0.152: R6.2 1.3,27.73 LED1.C
N$10
  Top 0.152: TFT1.1 45.06,10.4 R25.1 Q1.3
N$11
  Top 0.152: TFT1.2 44.03,18 43.81,17.78 43.81,9.11 R16.2
N$12
  Top 0.152: U1.63 33.13,40.99 LED.A
N$13
  Top 0.152: TFT1.3 43.9,18.5 43.18,17.78 43.18,7.2 R17.2
N$14
  Top 0.152: TFT1.4 43.77,19 42.55,17.78 42.55,5.29 R18.2
N$15
  Top 0.152: TFT1.5 43.63,19.5 41.91,17.78 R19.2
N$16
  Top 0.152: R20.2 52.92,7.45 Q1.1
N$17
  Top 0.152: TFT1.32 43.92,33 43.81,32.89 43.81,32.38 | 43.81,32.38 43.81,31.95 | 43.81,31.95 43.81,31.42 | 43.81,31.42 43.81,30.96 | 43.81,30.96 43.81,30.4 | 43.81,30.4 43.81,29.97 | 43.81,29.97 43.81,29.49 | 43.81,29.49 43.81,28.93 | 43.81,28.93 43.81,28.47 | 43.81,28.47 43.81,27.96 | 43.81,27.96 43.81,27.53 | 43.81,27.53 43.81,27 | 43.81,27 43.81,26.49 | 43.81,26.49 43.81,25.98 | 43.81,25.98 43.81,25.5 | 43.81,25.5 43.81,25.09 | 43.81,25.09 43.81,24.64 43.94,24.51 45.05,24.51 TFT1.15 | TFT1.31 43.93,32.5 43.81,32.38 | TFT1.30 43.86,32 43.81,31.95 | TFT1.29 43.9,31.5 43.81,31.42 | TFT1.28 43.85,31 43.81,30.96 | TFT1.27 43.91,30.5 43.81,30.4 | TFT1.26 43.84,30 43.81,29.97 | TFT1.25 43.83,29.5 43.81,29.49 | TFT1.24 43.88,29 43.81,28.93 | TFT1.23 43.84,28.5 43.81,28.47 | TFT1.22 43.85,28 43.81,27.96 | TFT1.21 43.85,27.5 43.81,27.53 | TFT1.20 43.81,27 | 43.81,27 | TFT1.19 43.82,26.5 43.81,26.49 | TFT1.18 43.83,26 43.81,25.98 | TFT1.17 43.82,25.5 43.81,25.5 | TFT1.16 43.91,25 43.81,25.09
N$18
  Top 0.152: R2.2 38.95,38.95 38.76,39.13 35.98,41.91 LED.C
N$27
  Top 0.152: U1.32 18.18,33.99 Y2.3
N$28
  Top 0.152: U1.33 21.57,30.84 20.19,29.46 14.53,29.46 Y2.1
PRINTER_CTS  (via drill 0.28)
  Top 0.152: U1.61 34.02,39.99 v34.04,40.01 | v60.96,57.28 PRINTER.8
  Bottom 0.152: v34.04,40.01 51.44,57.28 v60.96,57.28
PRINTER_ERASE  (via drill 0.28)
  Top 0.152: U1.53 32.94,35.99 v36.45,39.5 | v66.04,54.48 PRINTER.11
  Bottom 0.152: v36.45,39.5 52.32,55.37 65.15,55.37 v66.04,54.48
PRINTER_RESET  (via drill 0.28)
  Top 0.152: U1.54 32.68,36.49 v35.69,39.5 | v68.58,54.48 PRINTER.13
  Bottom 0.152: v35.69,39.5 52.07,55.88 67.18,55.88 v68.58,54.48
PRINTER_RTS  (via drill 0.28)
  Top 0.152: U1.62 33.38,40.49 v33.4,40.51 | v62.23,58.8 PRINTER.10
  Bottom 0.152: v33.4,40.51 33.91,40.51 51.18,57.78 61.21,57.78 v62.23,58.8
PRINTER_RX  (via drill 0.28)
  Top 0.152: U1.40 25.07,32.82 27.81,35.56 v29.84,35.56 | v68.58,57.15 PRINTER.14
  Bottom 0.152: v29.84,35.56 30.99,35.56 51.94,56.39 67.94,56.39 v68.58,57.15
PRINTER_TX  (via drill 0.28)
  Top 0.152: U1.39 24.57,32.95 28.07,36.45 v29.84,36.45 | v66.04,57.15 PRINTER.12
  Bottom 0.152: v29.84,36.45 31.24,36.45 51.56,56.77 65.66,56.77 v66.04,57.15
PROGRAM
  Top 0.152: U4.10 11.68,40.39 11.43,40.64 8.89,40.64 8,39.75 8,37.21 7.08,36.29 SW3.2 SW3.4
RESET_B  (via drill 0.28)
  Top 0.152: R12.2 36.83,26.04 35.31,27.56 24.51,27.56 22.07,30 U1.34 22.07,33.81 v20.95,34.92 | U4.4 v12.19,34.92 | U4.13 v8.64,38.86
  Bottom 0.152: v20.95,34.92 v12.19,34.92 9.53,34.92 8.64,35.81 v8.64,38.86
SCL  (via drill 0.25, 0.28)
  Top 0.152: U$20.P3 35.97,49.05 v34.92,48.01 34.92,45.51 R21.1 | U1.37 23.57,36.4 v26.67,39.5
  Bottom 0.152: v26.67,39.5 34.92,47.75 v34.92,48.01
SCREW_VIN
  pour Top (isolate 0.203): 42.55,55.5 42.55,60.07 54.61,60.07 54.61,55.5 49.53,55.5 49.53,57.78 46.99,57.78 46.99,55.5
SD_CARD_DETECT
  Top 0.152: U1.35 22.57,30.14 24.64,28.07 36.07,28.07 38.1,26.04 38.1,16.73 R23.1 36.71,16.09 J1.12
SD_CS
  Top 0.152: J1.2 33.22,6.54 33.66,6.99 | U1.43 26.57,29.31 27.3,28.57 36.2,28.57 38.73,26.04 38.73,18.41 40.01,17.14 40.01,8.29 R27.1 33.69,7.02
  Top 0.203: 33.66,6.99 33.69,7.02
SDA  (via drill 0.25, 0.28)
  Top 0.152: U$20.P2 36.36,48.55 v35.69,47.88 35.69,45.59 38.73,42.55 R22.1 | U1.38 24.07,36.13 v27.94,40.01
  Bottom 0.152: v27.94,40.01 35.69,47.75 v35.69,47.88
SPI_CLK  (via drill 0.25, 0.28)
  Top 0.152: U1.50 33.73,34.49 v34.75,35.51 | J1.5 29.91,7.56 v29.97,7.62 | v42.55,31.37 v42.55,35.51 42.5,35.5 TFT1.37
  Bottom 0.152: v34.75,35.51 v42.55,35.51 | v29.97,7.62 31.62,9.27 31.62,20.57 v42.55,31.37
SPI_MISO  (via drill 0.25, 0.28)
  Top 0.152: TFT1.33 v43.18,33.5 | U1.52 v32.05,35.48 | J1.7 27.71,7.39 v27.94,7.62
  Bottom 0.152: v32.05,35.48 34.04,33.5 v43.18,33.5 43.18,33.02 31.11,20.95 31.11,10.79 v27.94,7.62
SPI_MOSI  (via drill 0.25, 0.28)
  Top 0.152: TFT1.34 43.83,34 v43.81,34.01 | U1.51 33.39,34.99 v33.4,34.98 | v32.13,7.75 32.13,5.26 J1.3
  Bottom 0.152: v33.4,34.98 34.37,34.01 v43.81,34.01 43.81,31.75 32.13,20.07 v32.13,7.75
TOUCH_INT  (via drill 0.28)
  Top 0.152: U$20.P5 36.08,50.05 34.16,48.13 v34.16,47.75 | U1.36 23.07,36.66 v26.67,40.26
  Bottom 0.152: v26.67,40.26 v34.16,47.75
UART2_CTS  (via drill 0.28)
  Top 0.152: v25.5,35.41 v28.58,38.49 U1.58 | X1.7 20.23,11.34 v21.59,12.7 | FTDI.1 6.6,39.12 v9.65,42.16
  Bottom 0.152: v9.65,42.16 23.13,42.16 26.81,38.49 v28.58,38.49 | v25.5,35.41 25.5,34.31 26.04,33.78 26.04,17.14 v21.59,12.7
UART2_RTS  (via drill 0.28)
  Top 0.152: U1.57 28.85,37.99 v24.77,33.91 | v21.59,30.1 20.11,28.61 R5.2 20.23,27.82 X1.10 20.23,24.04 v19.05,22.86 | v3.3,49.28 FTDI.5
  Bottom 0.152: v21.59,30.1 24.77,33.27 v24.77,33.91 | v19.05,22.86 10.92,22.86 3.3,30.48 v3.3,49.28
UART2_RX  (via drill 0.28, 0.33)
  Top 0.152: U1.59 28.32,38.99 v24.77,35.43 | v8.26,26.92 8.26,25.38 X1.16
  Top 0.203: v6.35,40.64 7.37,41.66 D2.A
  Bottom 0.152: v8.26,26.92 16.26,26.92 v24.77,35.43
  Bottom 0.203: v8.26,26.92 6.35,28.83 v6.35,40.64
UART2_RX_5V
  Top 0.203: FTDI.3 D2.C
UART2_TX  (via drill 0.28, 0.33)
  Top 0.152: U1.60 28.11,39.49 v24.77,36.14 | X1.15 10.23,27.38 v10.29,27.43
  Top 0.203: v7.11,37.47 6.48,38.1 2.67,38.1 1.65,39.12 FTDI.2
  Bottom 0.152: v10.29,27.43 16.05,27.43 v24.77,36.14
  Bottom 0.203: v10.29,27.43 9.4,27.43 7.11,29.84 v7.11,37.47
USB_5V
  pour Top (isolate 0.203, rank 2): 20.83,53.59 20.83,55.63 24.89,55.63 24.89,60.07 35.56,60.07 35.56,57.78 26.04,57.78 26.04,55.24 24.77,55.24 24.77,53.59
USB_CON_N
  Top 0.267: J2.2 20.34,52.9 RN1.1
USB_CON_P
  Top 0.267: J2.3 19.68,52.83 RN1.2
USB_D_N
  Top 0.267: U1.6 26.57,42.47 27.73,41.32 29.17,41.32 31.45,43.6 31.45,46.57 29.55,48.47 22.86,48.47 22.57,48.47 21.8,48.47 20.28,50 20.28,50.42 20.55,50.69 RN1.4
USB_D_P
  Top 0.267: U1.5 27.07,42.57 27.9,41.74 29,41.74 31.03,43.78 31.03,46.39 29.38,48.05 22.86,48.05 22.39,48.05 21.63,48.05 19.85,49.82 19.85,50.42 19.55,50.73 RN1.3
USB_SHIELD
  Top 0.305: 23.43,55.72 J2.S3
  Top 0.343: J2.S1 23.5,57.55 23.5,56.52 22.89,56.52 J2.S3
  pour Top (isolate 0.203, rank 3): 24.38,60.33 24.38,54.61 14.61,54.61 12.06,57.15 12.06,60.33
VCC  (via drill 0.28)
  Top 0.305: FTDI.4 v1.65,49.53
  Bottom 0.305: v1.65,49.53 1.65,53.72 6.99,59.05 30.48,59.05 v33.02,56.52
  pour Top (rank 2): 31.75,57.15 36.96,57.15 36.96,52.7 34.42,52.7 34.42,53.98 31.75,53.98
VDDA
  Top 0.152: U1.13 23.07,44.24 21.38,45.94 C5.1 17.14,47.2 R1.1 16.68,47.67 L2.1
VREF_OUT
  Top 0.152: U1.17 17.78,41.49 C7.1
VREFH
  Top 0.152: U1.14 22.57,44.1 21.59,45.09 15.46,45.09 C6.1 14.61,47.2 R1.2
VREFL
  Top 0.152: U1.16 21.57,43.96 21.34,44.2 17.18,44.2 C5.2 C6.2 | C6.2 L1.2 | C6.2 14.61,42.97 C7.2
  Top 0.203: U1.15 U1.16

## Text on the board
tPlace: ° | + | - | ° | POWER | PROGRAM | OTA Updates | PTA0 | PTA2 | PTA4 | Printrhub Rev 0.1 | RESET | GPIO0 | PTA1 | PTA3 | RESET